# Altium PCB LEDOption1.PcbDoc
Units mil, origin at the board's own origin, x right, y up, seen from the top; angles counter-clockwise.
Board outline 500 x 550 mil, 2 copper layers (Top Layer, Bottom Layer); 2 components, 2 nets, 9 pads, 0 vias.
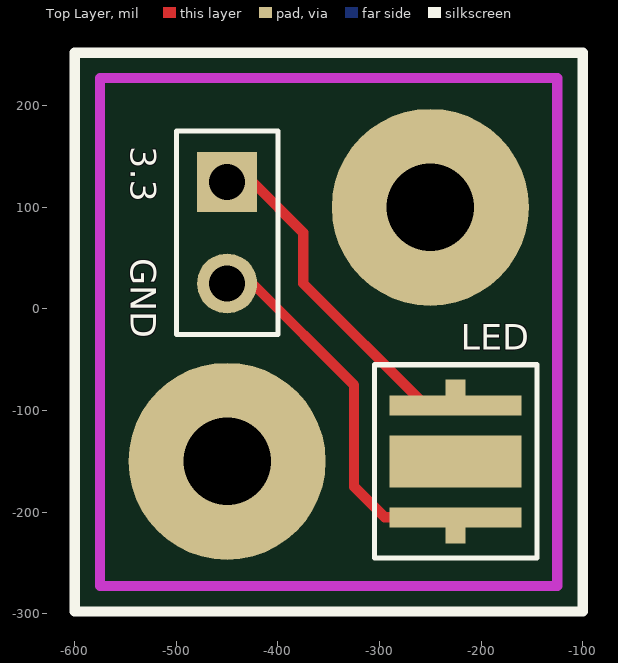
[diagram p0: Top Layer view]
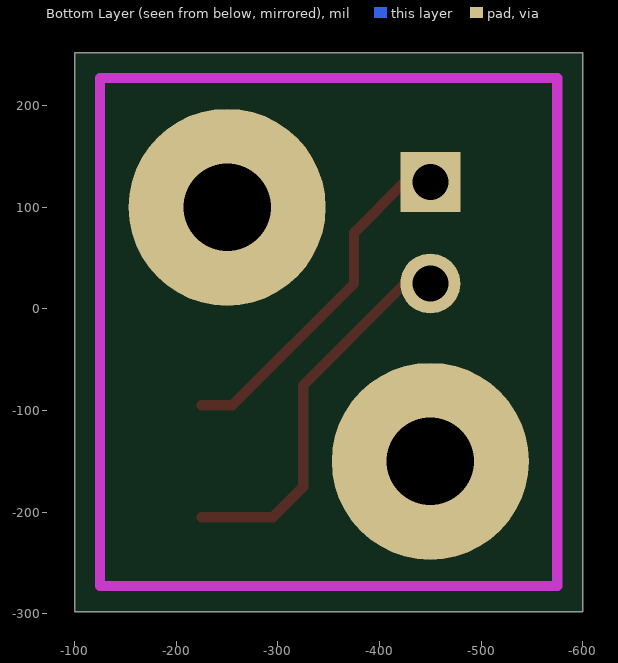
[diagram p1: Bottom Layer view, seen from below]

## Layer stack, top to bottom
Top Layer: signal copper 1.4
Dielectric: dielectric 12.6, FR-4, Dk 4.8
Bottom Layer: signal copper 1.4

## Board outline
-600,-297.83 -600,252.17 -100,252.17 -100,-297.83

## Design rules (kind name [scope] priority, off if disabled: settings)
Clearance [All] p1: gap=10
PolygonConnect [All] p1: connectstyle=Relief reliefconductorwidth=10 reliefentries=4 polygonreliefangle="90 Angle"
RoutingVias [All] p1: holewidth=28 width=50 viastyle="Through Hole" minholewidth=28 minwidth=50 maxholewidth=28 maxwidth=50
SilkscreenOverComponentPads SilkToSolderMaskClearance [IsPad] p1: minsilkscreentomaskgap=10
SolderMaskExpansion [All] p1: expansion=4
Width [All] p1: maxlimit=10 minlimit=10 preferedwidth=10
27 further rules are at their usual default settings.

## Classes and differential pairs
component class LED: LED

## Components (designator, comment, footprint, x,y, rotation, side; value= is the part's Value field where it differs from the comment)
LED "LED" LED -225,-150 r180 top (schematic designator P10)
P9 "Header" HDR1X2 -450,125 r270 top

## Footprints (in the part's own frame and the unit in brackets; to place one, negate y for a bottom-side part, rotate by r counter-clockwise, add the part's x,y. Pads: shape width x height; smd on the part's side, far side on the other; paste and mask are expansions set on the pad)
HDR1X2 [mm] "Connector; Header; 2 Position"
  rect 1.5x1.5 hole 0.9: 1(0,0)
  round 1.5 hole 0.9: 2(2.54,0)
  silkscreen extent -1.27,-1.27 3.81,1.27
LED [mm]
  rect 0.5x0.4 smd: 1(0,1.85) 2(0,-1.85)
  rect 3.3x0.5 smd: 1(0,1.4) 2(0,-1.4)
  rect 3.3x1.3 smd: ""(0,0)
  silkscreen extent -2.03,-2.41 2.03,2.41

## Part data
LED: library part Component_1
P9: library part "Header 2", "Header, 2-Pin"

## Free pads (board coordinates)
  round 194 hole 86 unplated: 0(-450,-150) 0(-250,100)

## Nets (pads, with @x,y where several pads share a name; then routed paths per layer and width w, separated by ;. In a path a pad name is that pad's centre, name@x,y a point inside that pad or via, vN(x,y) a via of type N, cw(c..) or ccw(c..) an arc to the next point about the centre after c; other vN are vias at no path point)
GND: LED.1 P9.2 | length 353.9
  Top Layer w10: P9.2@-425,25 -325,-75 -325,-175 -294.88,-205.12 LED.1@-225,-205.12
VDD3.3: LED.2 P9.1 | length 345.4
  Top Layer w10: P9.1 -425,125 -375,75 -375,25 -255.12,-94.88 LED.2@-225,-94.88
pads on no net: LED.

## Keep-outs
Keep-Out Layer:
  lines w10: -575,-272.83 -125,-272.83 -125,227.17 -575,227.17 -575,-272.83

## Silkscreen, mask and mechanical layers (free items; w line width, h text height)
Top Overlay:
  the board outline again, w10
  text "3.3" at -545,160 h25 r270
  text "GND" at -545,50 h25 r270